# EAGLE board astable (EAGLE 7.5.0)
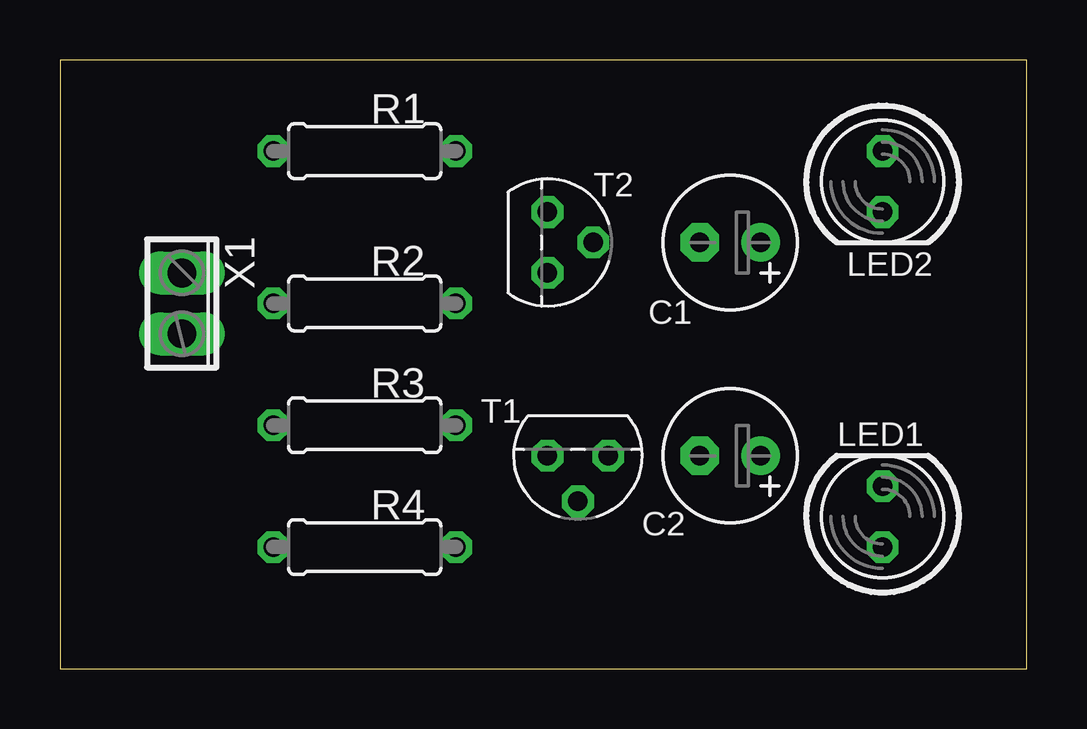
[diagram p0: board, top side]
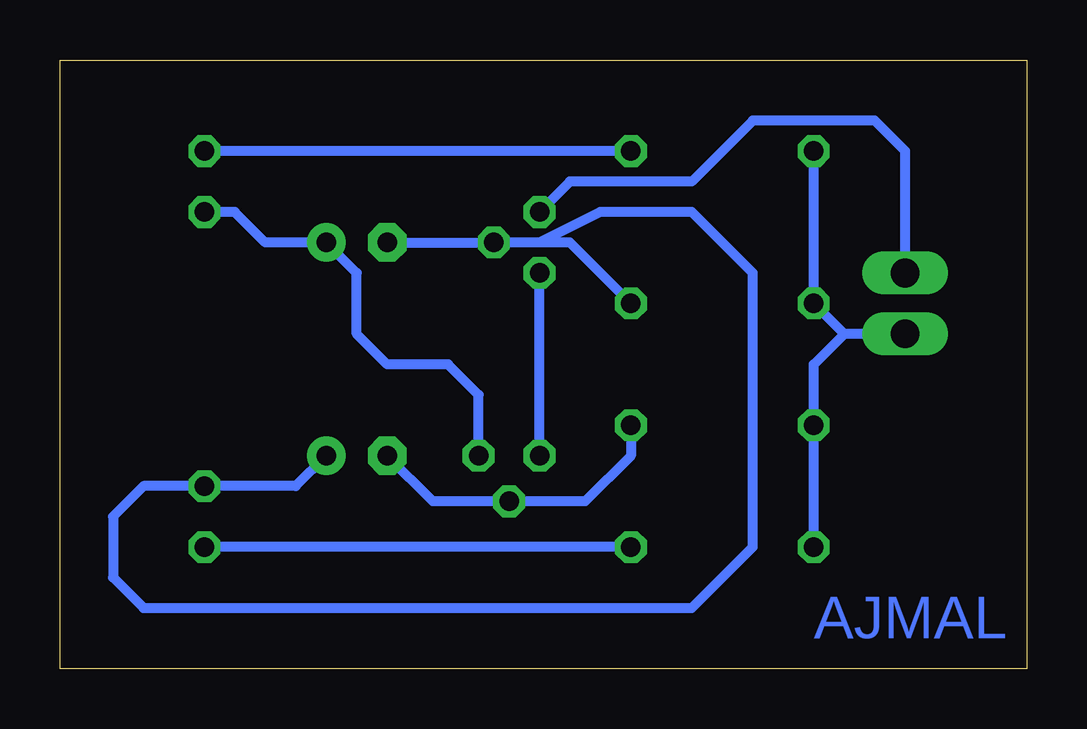
[diagram p1: board, bottom side, seen from below]

Size 40.31 x 25.39 mm. Coordinates in mm from the lower left corner, seen from the top.
Outline: 0,25.39 0,0 40.31,0 40.31,25.39 0,25.39
Copper layers (1*16): Top 0.035mm / dielectric 1.5mm / Bottom 0.035mm
Design rules "default": minimum track width 10mil, minimum drill 24mil, track to track 8mil, track to pad 8mil, pad to pad 8mil, via to via 8mil, smd to smd 8mil, copper to edge 40mil, drill to drill 8mil, minimum pad ring 10mil, minimum via ring 8mil, stop-mask expansion 4mil, vias tented up to drill 0mil, thermal gap 10mil

## Footprints (pad centres in the part's own frame; a part is rotated, then mirrored left to right if it is on the bottom)
E2,5-6 = drill 0.813 pad 1.6: + -1.27,0 | drill 0.813 pad 1.6 octagon: - 1.27,0
LED5MM = drill 0.813 octagon: A -1.27,0; K 1.27,0
0207/7 = drill 0.813 octagon: 1 -3.81,0; 2 3.81,0
TO92 = drill 0.813 octagon: 1 1.27,0; 2 0,1.905; 3 -1.27,0
2POL254 = drill 1.2 long: 1 -1.27,0; 2 1.27,0

## Placement (x,y rotation side)
C1  10uF  [E2,5-6]  27.94,17.78 180 top
C2  10uF  [E2,5-6]  27.94,8.89 180 top
LED1  [LED5MM]  34.29,6.35 90 top
LED2  [LED5MM]  34.29,20.32 270 top
R1  100E  [0207/7]  12.7,21.59 180 top
R2  100K  [0207/7]  12.7,15.24 180 top
R3  100K  [0207/7]  12.7,10.16 180 top
R4  100E  [0207/7]  12.7,5.08 180 top
T1  BC547  [TO92]  21.59,8.89 180 top
T2  BC547  [TO92]  20.32,17.78 270 top
X1  [2POL254]  5.08,15.24 270 top

## Library data of the parts
C1 C2 R1-R4 = resistor
LED1 LED2 = led
T1 T2 = transistor
X1 = con-phoenix-254; OC_FARNELL: unknown; OC_NEWARK: unknown

## Nets
N$1: R1.2 R2.2 R3.2 R4.2 X1.2
N$2: LED1.A R4.1
N$3: LED2.A R1.1
N$4: C1.+ LED2.K T1.3
N$6: C1.- C2.+ LED1.K R2.1 T2.2
N$7: C2.- R3.1 T1.2
N$8: T1.1 T2.1
S$1: T2.3 X1.1

## Tracks (layer width: path | path; a pad name or v marks a point on that pad's centre or on a via)
N$1
  Bottom 0.406: X1.2 7.62,13.97 | 7.62,13.97 R2.2 R1.2 | R4.2 R3.2 8.89,12.7 7.62,13.97
N$2
  Bottom 0.406: R4.1 LED1.A
N$3
  Bottom 0.406: R1.1 LED2.A
N$4
  Bottom 0.406: LED2.K 33.02,19.05 31.75,17.78 C1.+ 27.94,16.51 27.94,13.97 26.67,12.7 24.13,12.7 22.86,11.43 T1.3
N$6
  Bottom 0.406: C1.- T2.2 20.32,17.78 | R2.1 19.05,17.78 20.32,17.78 | 20.32,17.78 17.78,19.05 13.97,19.05 11.43,16.51 11.43,5.08 13.97,2.54 36.83,2.54 38.1,3.81 38.1,6.35 36.83,7.62 LED1.K 30.48,7.62 C2.+
N$7
  Bottom 0.406: R3.1 16.51,8.89 18.41,6.99 T1.2 24.77,6.99 C2.-
N$8
  Bottom 0.406: T1.1 T2.1
S$1
  Bottom 0.406: X1.1 5.08,21.59 6.35,22.86 11.43,22.86 13.97,20.32 19.05,20.32 T2.3

## Text on the board
Bottom: AJMAL